# EAGLE board tes1-print (EAGLE 6.2)
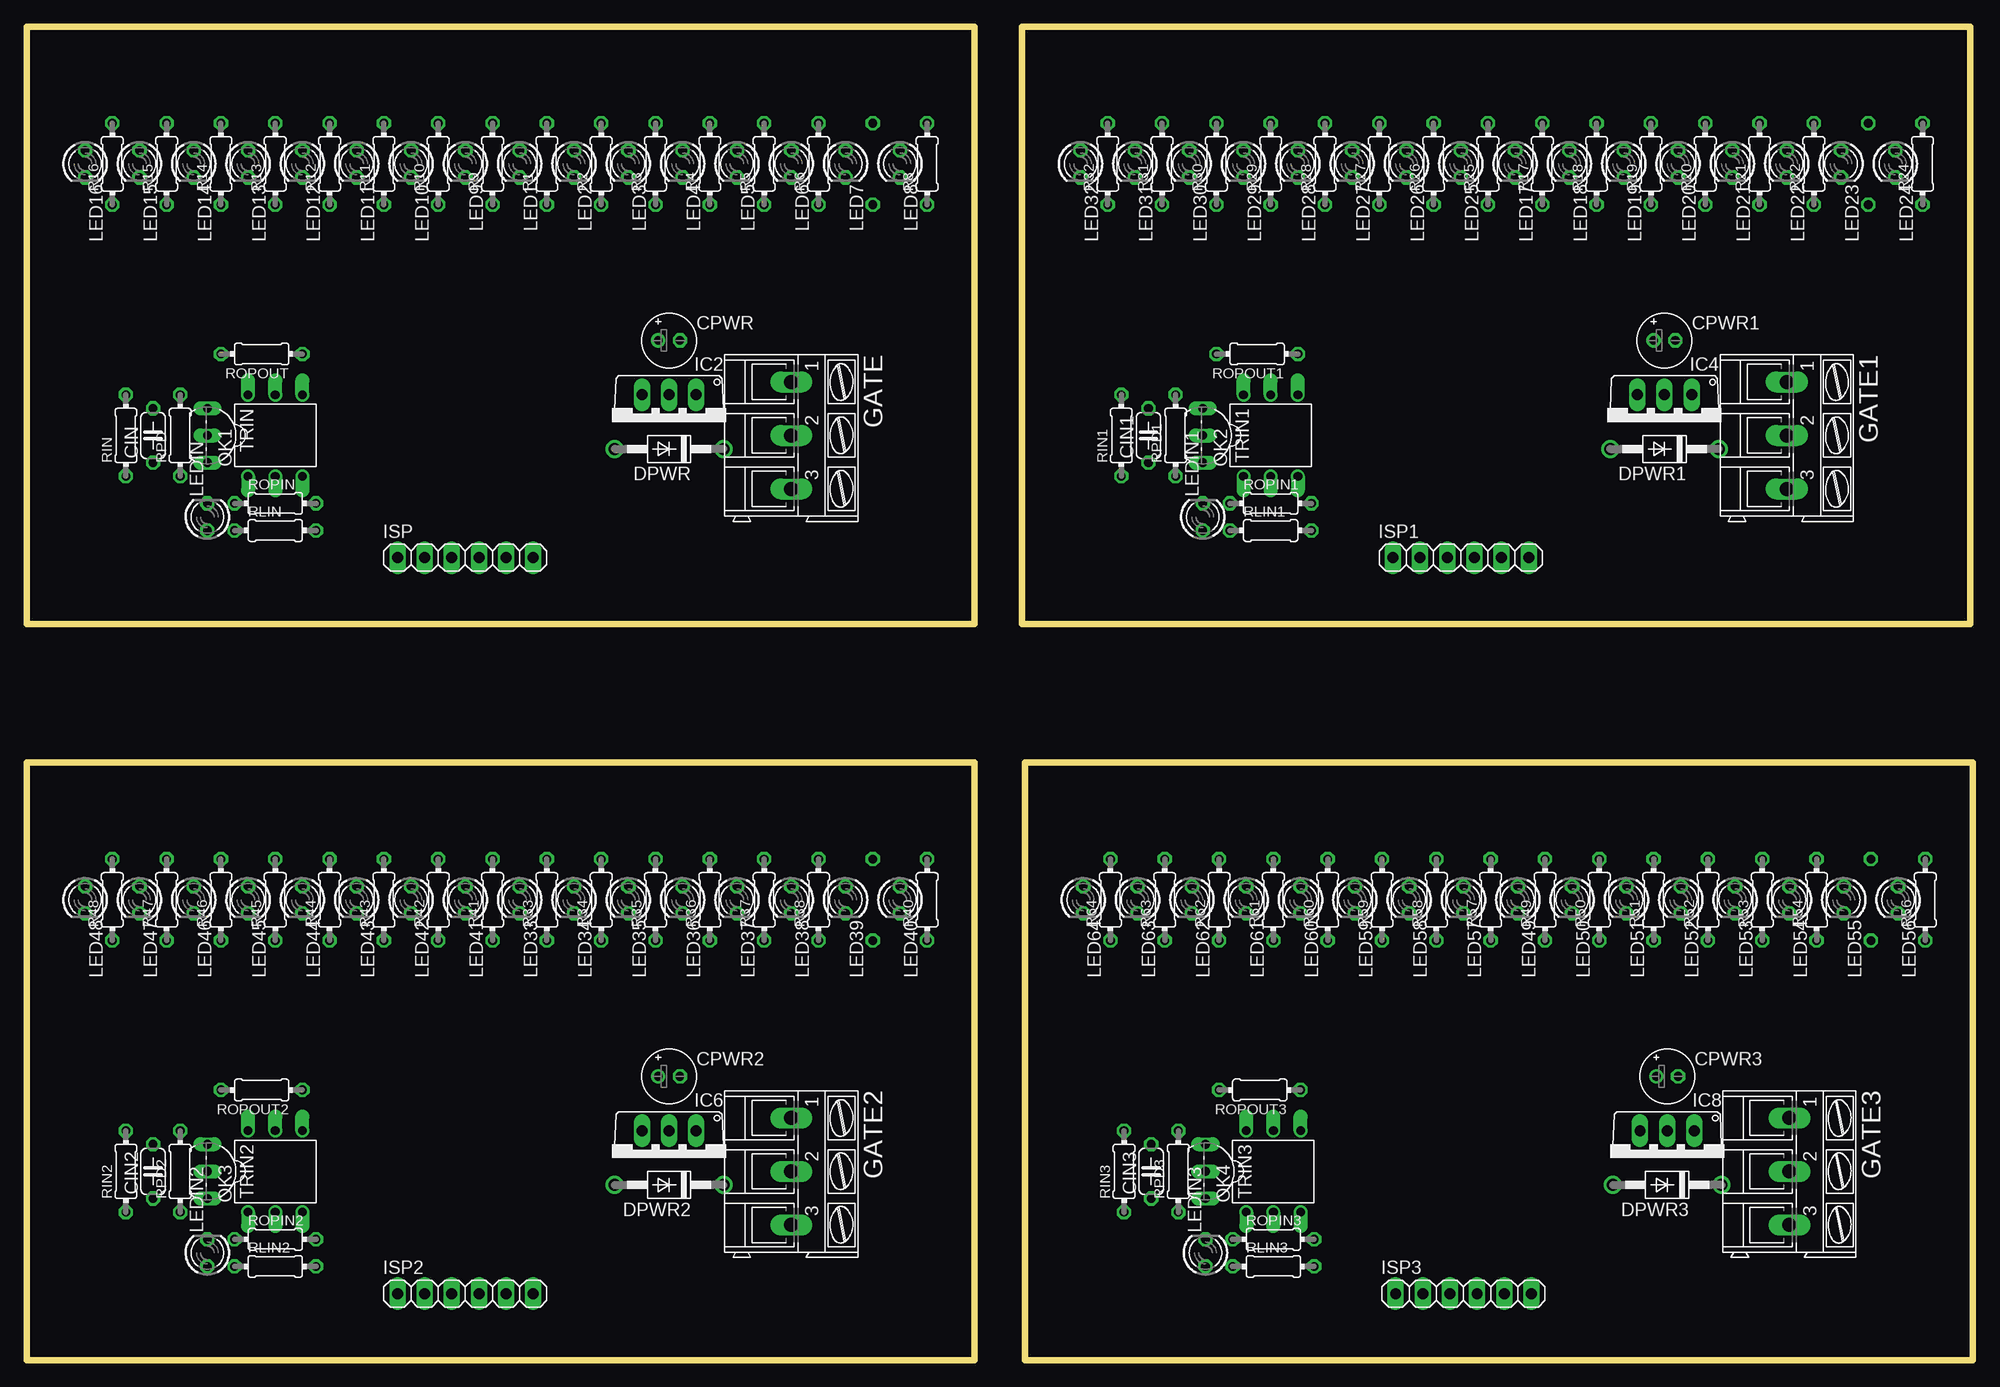
[diagram p0: board, top side]
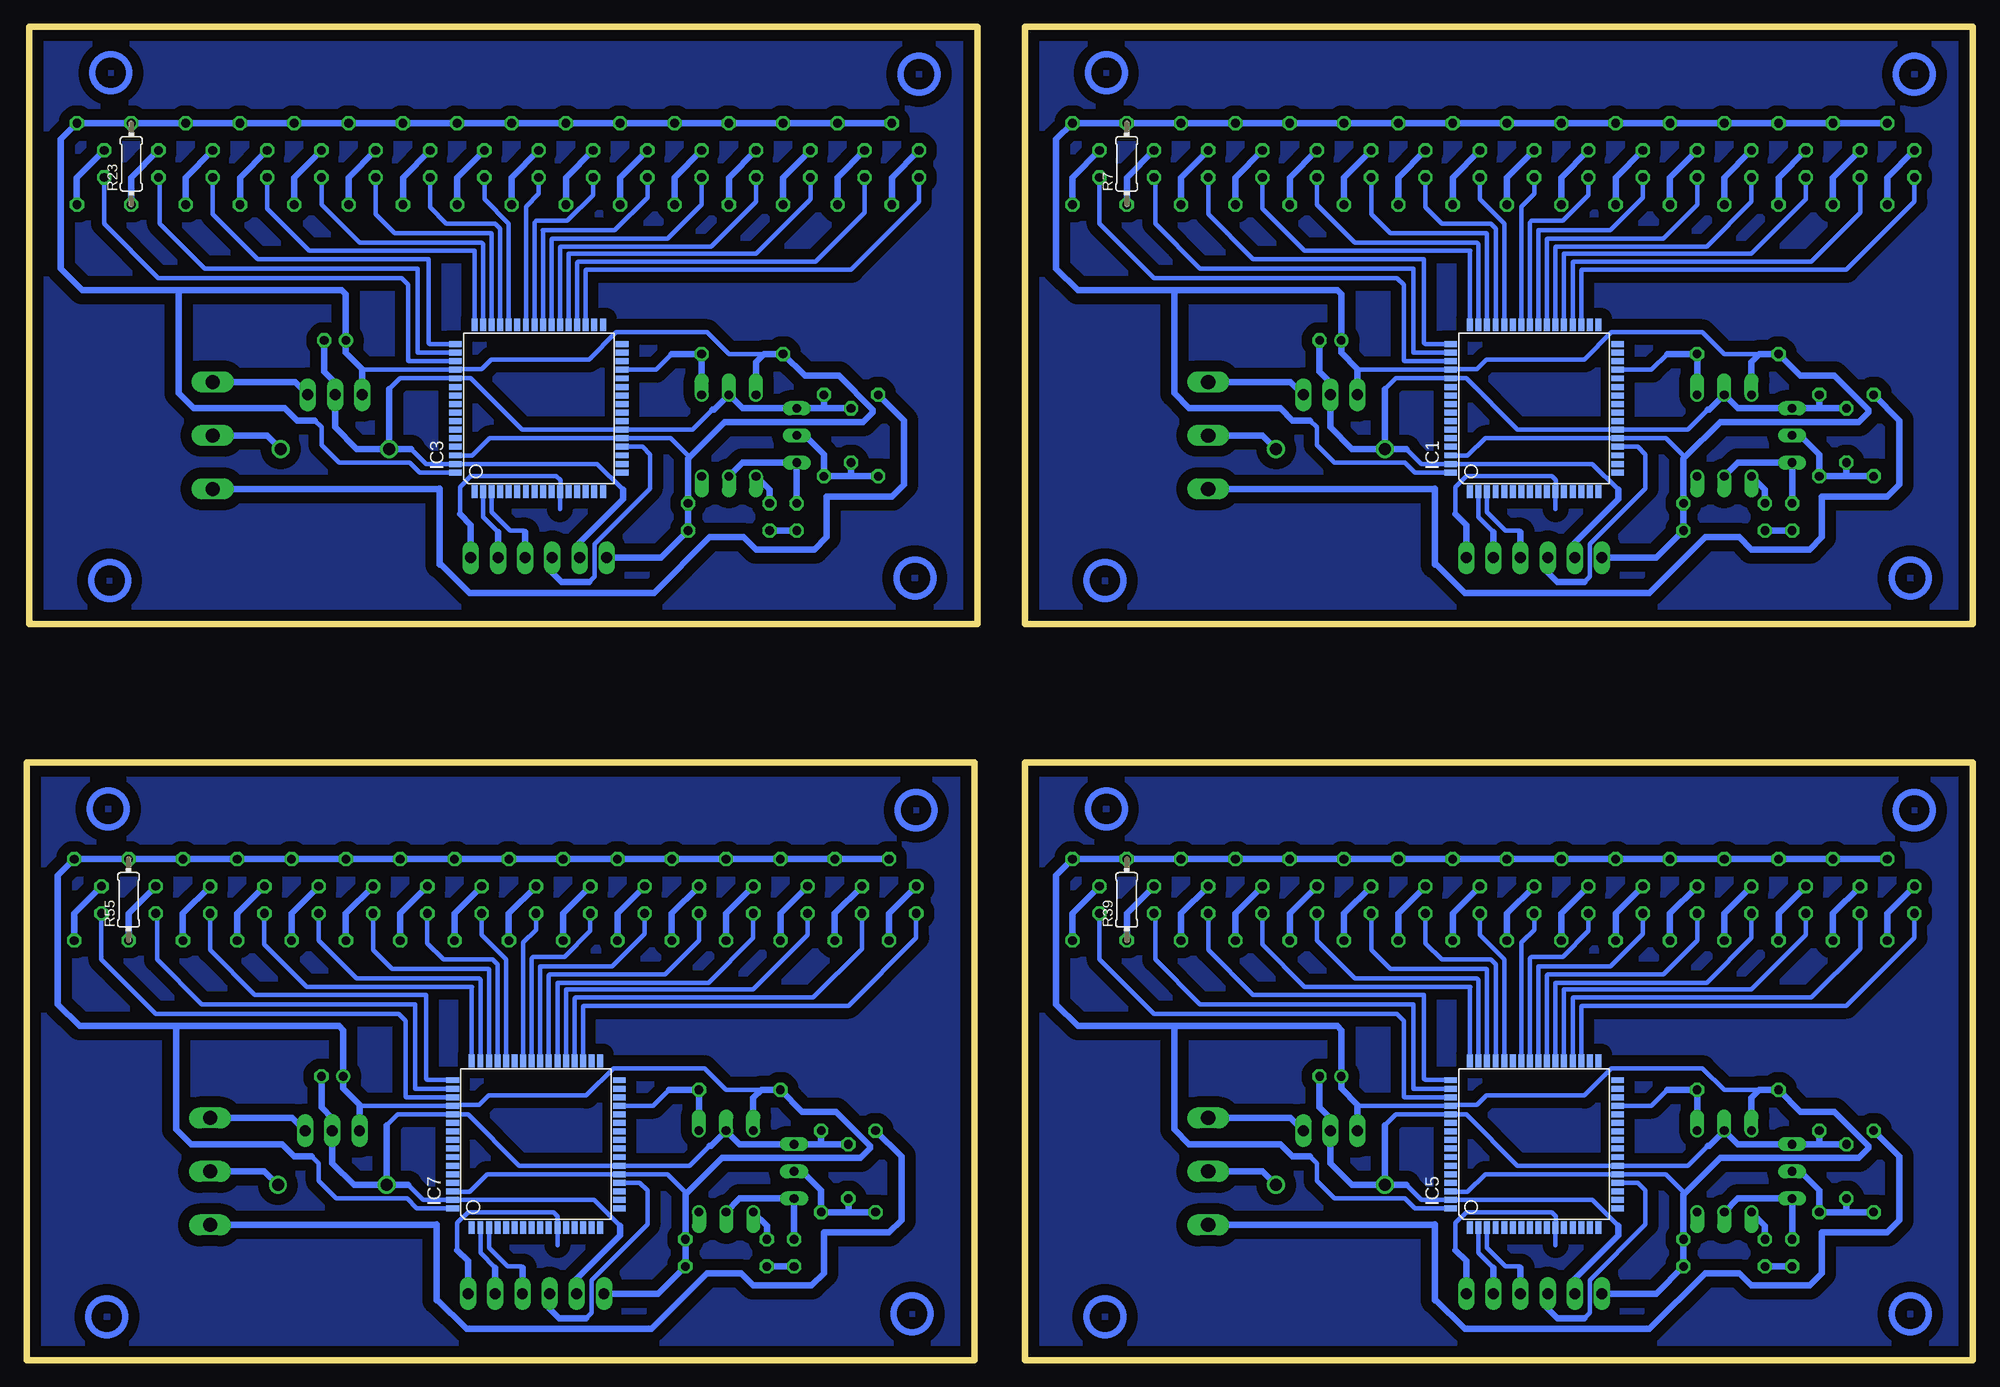
[diagram p1: board, bottom side, seen from below]

Size 181.99 x 124.71 mm. Coordinates in mm from the lower left corner, seen from the top.
Outline: 88.65,124.71 88.65,68.83 0,68.83 0,124.71 88.65,124.71
Outline: 181.74,124.71 181.74,68.83 93.09,68.83 93.09,124.71 181.74,124.71
Outline: 88.65,55.88 88.65,0 0,0 0,55.88 88.65,55.88
Outline: 181.99,55.88 181.99,0 93.34,0 93.34,55.88 181.99,55.88
Copper layers (1*16): Top 0.035mm / dielectric 1.5mm / Bottom 0.035mm
Design rules: minimum track width 10mil, minimum drill 24mil, track to track 8mil, track to pad 8mil, pad to pad 8mil, via to via 8mil, smd to smd 8mil, copper to edge 40mil, drill to drill 8mil, minimum pad ring 10mil, minimum via ring 8mil, stop-mask expansion 4mil, vias tented up to drill 0mil, thermal gap 10mil

## Footprints (pad centres in the part's own frame; a part is rotated, then mirrored left to right if it is on the bottom)
C050-024X044 = drill 0.813 octagon: 1 -2.54,0; 2 2.54,0
E2-5 = drill 0.813 pad 1.27: + -1.016,0 | drill 0.813 pad 1.27 octagon: - 1.016,0
DO41-10 = drill 1.118: A 5.08,0; C -5.08,0
AK300/3 = drill 1.321 long: 1 -5.004,0; 2 0,0; 3 5.004,0
TQFP64 = smd 1.194 x 0.559: 1 -7.8,6; 2 -7.8,5.2; 3 -7.8,4.4; 4 -7.8,3.6; 5 -7.8,2.8; 6 -7.8,2; 7 -7.8,1.2; 8 -7.8,0.4; 9 -7.8,-0.4; 10 -7.8,-1.2; 11 -7.8,-2; 12 -7.8,-2.8; 13 -7.8,-3.6; 14 -7.8,-4.4; 15 -7.8,-5.2; 16 -7.8,-6; 33 7.8,-6; 34 7.8,-5.2; 35 7.8,-4.4; 36 7.8,-3.6; 37 7.8,-2.8; 38 7.8,-2; 39 7.8,-1.2; 40 7.8,-0.4; 41 7.8,0.4; 42 7.8,1.2; 43 7.8,2; 44 7.8,2.8; 45 7.8,3.6; 46 7.8,4.4; 47 7.8,5.2; 48 7.8,6 | smd 0.559 x 1.194: 17 -6,-7.8; 18 -5.2,-7.8; 19 -4.4,-7.8; 20 -3.6,-7.8; 21 -2.8,-7.8; 22 -2,-7.8; 23 -1.2,-7.8; 24 -0.4,-7.8; 25 0.4,-7.8; 26 1.2,-7.8; 27 2,-7.8; 28 2.8,-7.8; 29 3.6,-7.8; 30 4.4,-7.8; 31 5.2,-7.8; 32 6,-7.8; 49 6,7.8; 50 5.2,7.8; 51 4.4,7.8; 52 3.6,7.8; 53 2.8,7.8; 54 2,7.8; 55 1.2,7.8; 56 0.4,7.8; 57 -0.4,7.8; 58 -1.2,7.8; 59 -2,7.8; 60 -2.8,7.8; 61 -3.6,7.8; 62 -4.4,7.8; 63 -5.2,7.8; 64 -6,7.8
TO220V = drill 1.016 long: 1 -2.54,-2.54; 2 0,-2.54; 3 2.54,-2.54
1X06 = drill 1.016 long: 1 -6.35,0; 2 -3.81,0; 3 -1.27,0; 4 1.27,0; 5 3.81,0; 6 6.35,0
LED3MM = drill 0.813 octagon: A -1.27,0; K 1.27,0
DIL06 = drill 0.813 offset: 1 -2.54,-3.81; 2 0,-3.81; 3 2.54,-3.81; 4 2.54,3.81; 5 0,3.81; 6 -2.54,3.81
0204/7 = drill 0.813 octagon: 1 -3.81,0; 2 3.81,0
TO92-EBC = drill 0.813 long: B 0,-1.27; C 2.54,-1.27; E -2.54,-1.27

## Placement (x,y rotation side)
CIN  100n  [C050-024X044]  11.81,86.49 90 top
CIN1  100n  [C050-024X044]  104.9,86.49 90 top
CIN2  100n  [C050-024X044]  11.81,17.65 90 top
CIN3  100n  [C050-024X044]  105.16,17.65 90 top
CPWR  100u  [E2-5]  60.07,95.38 0 top
CPWR1  100u  [E2-5]  153.16,95.38 0 top
CPWR2  100u  [E2-5]  60.07,26.54 0 top
CPWR3  100u  [E2-5]  153.42,26.54 0 top
DPWR  1N4004  [DO41-10]  60.07,85.22 180 top
DPWR1  1N4004  [DO41-10]  153.16,85.22 180 top
DPWR2  1N4004  [DO41-10]  60.07,16.38 180 top
DPWR3  1N4004  [DO41-10]  153.42,16.38 180 top
GATE  [AK300/3]  71.5,86.49 270 top
GATE1  [AK300/3]  164.59,86.49 270 top
GATE2  [AK300/3]  71.5,17.65 270 top
GATE3  [AK300/3]  164.85,17.65 270 top
IC1  MEGA128-A  [TQFP64]  41.02,89.03 90 bottom
IC2  7805TV  [TO220V]  60.07,87.76 180 top
IC3  MEGA128-A  [TQFP64]  134.11,89.03 90 bottom
IC4  7805TV  [TO220V]  153.16,87.76 180 top
IC5  MEGA128-A  [TQFP64]  41.02,20.19 90 bottom
IC6  7805TV  [TO220V]  60.07,18.92 180 top
IC7  MEGA128-A  [TQFP64]  134.37,20.19 90 bottom
IC8  7805TV  [TO220V]  153.42,18.92 180 top
ISP  [1X06]  41.02,75.06 0 top
ISP1  [1X06]  134.11,75.06 0 top
ISP2  [1X06]  41.02,6.22 0 top
ISP3  [1X06]  134.37,6.22 0 top
LED1  [LED3MM]  46.1,111.89 270 top
LED2  [LED3MM]  51.18,111.89 270 top
LED3  [LED3MM]  56.26,111.89 270 top
LED4  [LED3MM]  61.34,111.89 270 top
LED5  [LED3MM]  66.42,111.89 270 top
LED6  [LED3MM]  71.5,111.89 270 top
LED7  [LED3MM]  76.58,111.89 270 top
LED8  [LED3MM]  81.66,111.89 270 top
LED9  [LED3MM]  41.02,111.89 270 top
LED10  [LED3MM]  35.94,111.89 270 top
LED11  [LED3MM]  30.86,111.89 270 top
LED12  [LED3MM]  25.78,111.89 270 top
LED13  [LED3MM]  20.7,111.89 270 top
LED14  [LED3MM]  15.62,111.89 270 top
LED15  [LED3MM]  10.54,111.89 270 top
LED16  [LED3MM]  5.46,111.89 270 top
LED17  [LED3MM]  139.19,111.89 270 top
LED18  [LED3MM]  144.27,111.89 270 top
LED19  [LED3MM]  149.35,111.89 270 top
LED20  [LED3MM]  154.43,111.89 270 top
LED21  [LED3MM]  159.51,111.89 270 top
LED22  [LED3MM]  164.59,111.89 270 top
LED23  [LED3MM]  169.67,111.89 270 top
LED24  [LED3MM]  174.75,111.89 270 top
LED25  [LED3MM]  134.11,111.89 270 top
LED26  [LED3MM]  129.03,111.89 270 top
LED27  [LED3MM]  123.95,111.89 270 top
LED28  [LED3MM]  118.87,111.89 270 top
LED29  [LED3MM]  113.79,111.89 270 top
LED30  [LED3MM]  108.71,111.89 270 top
LED31  [LED3MM]  103.63,111.89 270 top
LED32  [LED3MM]  98.55,111.89 270 top
LED33  [LED3MM]  46.1,43.05 270 top
LED34  [LED3MM]  51.18,43.05 270 top
LED35  [LED3MM]  56.26,43.05 270 top
LED36  [LED3MM]  61.34,43.05 270 top
LED37  [LED3MM]  66.42,43.05 270 top
LED38  [LED3MM]  71.5,43.05 270 top
LED39  [LED3MM]  76.58,43.05 270 top
LED40  [LED3MM]  81.66,43.05 270 top
LED41  [LED3MM]  41.02,43.05 270 top
LED42  [LED3MM]  35.94,43.05 270 top
LED43  [LED3MM]  30.86,43.05 270 top
LED44  [LED3MM]  25.78,43.05 270 top
LED45  [LED3MM]  20.7,43.05 270 top
LED46  [LED3MM]  15.62,43.05 270 top
LED47  [LED3MM]  10.54,43.05 270 top
LED48  [LED3MM]  5.46,43.05 270 top
LED49  [LED3MM]  139.45,43.05 270 top
LED50  [LED3MM]  144.53,43.05 270 top
LED51  [LED3MM]  149.61,43.05 270 top
LED52  [LED3MM]  154.69,43.05 270 top
LED53  [LED3MM]  159.77,43.05 270 top
LED54  [LED3MM]  164.85,43.05 270 top
LED55  [LED3MM]  169.93,43.05 270 top
LED56  [LED3MM]  175.01,43.05 270 top
LED57  [LED3MM]  134.37,43.05 270 top
LED58  [LED3MM]  129.29,43.05 270 top
LED59  [LED3MM]  124.21,43.05 270 top
LED60  [LED3MM]  119.13,43.05 270 top
LED61  [LED3MM]  114.05,43.05 270 top
LED62  [LED3MM]  108.97,43.05 270 top
LED63  [LED3MM]  103.89,43.05 270 top
LED64  [LED3MM]  98.81,43.05 270 top
LEDIN  [LED3MM]  16.89,78.87 90 top
LEDIN1  [LED3MM]  109.98,78.87 90 top
LEDIN2  [LED3MM]  16.89,10.03 90 top
LEDIN3  [LED3MM]  110.24,10.03 90 top
OK1  H11L1M  [DIL06]  23.24,86.49 0 top
OK2  H11L1M  [DIL06]  116.33,86.49 0 top
OK3  H11L1M  [DIL06]  23.24,17.65 0 top
OK4  H11L1M  [DIL06]  116.59,17.65 0 top
R1  220  [0204/7]  48.64,111.89 90 top
R2  220  [0204/7]  53.72,111.89 90 top
R3  220  [0204/7]  58.8,111.89 90 top
R4  220  [0204/7]  63.88,111.89 90 top
R5  220  [0204/7]  68.96,111.89 90 top
R6  220  [0204/7]  74.04,111.89 90 top
R7  220  [0204/7]  79.12,111.89 90 bottom
R8  220  [0204/7]  84.2,111.89 90 top
R9  220  [0204/7]  43.56,111.89 90 top
R10  220  [0204/7]  38.48,111.89 90 top
R11  220  [0204/7]  33.4,111.89 90 top
R12  220  [0204/7]  28.32,111.89 90 top
R13  220  [0204/7]  23.24,111.89 90 top
R14  220  [0204/7]  18.16,111.89 90 top
R15  220  [0204/7]  13.08,111.89 90 top
R16  220  [0204/7]  8,111.89 90 top
R17  220  [0204/7]  141.73,111.89 90 top
R18  220  [0204/7]  146.81,111.89 90 top
R19  220  [0204/7]  151.89,111.89 90 top
R20  220  [0204/7]  156.97,111.89 90 top
R21  220  [0204/7]  162.05,111.89 90 top
R22  220  [0204/7]  167.13,111.89 90 top
R23  220  [0204/7]  172.21,111.89 90 bottom
R24  220  [0204/7]  177.29,111.89 90 top
R25  220  [0204/7]  136.65,111.89 90 top
R26  220  [0204/7]  131.57,111.89 90 top
R27  220  [0204/7]  126.49,111.89 90 top
R28  220  [0204/7]  121.41,111.89 90 top
R29  220  [0204/7]  116.33,111.89 90 top
R30  220  [0204/7]  111.25,111.89 90 top
R31  220  [0204/7]  106.17,111.89 90 top
R32  220  [0204/7]  101.09,111.89 90 top
R33  220  [0204/7]  48.64,43.05 90 top
R34  220  [0204/7]  53.72,43.05 90 top
R35  220  [0204/7]  58.8,43.05 90 top
R36  220  [0204/7]  63.88,43.05 90 top
R37  220  [0204/7]  68.96,43.05 90 top
R38  220  [0204/7]  74.04,43.05 90 top
R39  220  [0204/7]  79.12,43.05 90 bottom
R40  220  [0204/7]  84.2,43.05 90 top
R41  220  [0204/7]  43.56,43.05 90 top
R42  220  [0204/7]  38.48,43.05 90 top
R43  220  [0204/7]  33.4,43.05 90 top
R44  220  [0204/7]  28.32,43.05 90 top
R45  220  [0204/7]  23.24,43.05 90 top
R46  220  [0204/7]  18.16,43.05 90 top
R47  220  [0204/7]  13.08,43.05 90 top
R48  220  [0204/7]  8,43.05 90 top
R49  220  [0204/7]  141.99,43.05 90 top
R50  220  [0204/7]  147.07,43.05 90 top
R51  220  [0204/7]  152.15,43.05 90 top
R52  220  [0204/7]  157.23,43.05 90 top
R53  220  [0204/7]  162.31,43.05 90 top
R54  220  [0204/7]  167.39,43.05 90 top
R55  220  [0204/7]  172.47,43.05 90 bottom
R56  220  [0204/7]  177.55,43.05 90 top
R57  220  [0204/7]  136.91,43.05 90 top
R58  220  [0204/7]  131.83,43.05 90 top
R59  220  [0204/7]  126.75,43.05 90 top
R60  220  [0204/7]  121.67,43.05 90 top
R61  220  [0204/7]  116.59,43.05 90 top
R62  220  [0204/7]  111.51,43.05 90 top
R63  220  [0204/7]  106.43,43.05 90 top
R64  220  [0204/7]  101.35,43.05 90 top
RIN  1k  [0204/7]  9.27,86.49 90 top
RIN1  1k  [0204/7]  102.36,86.49 90 top
RIN2  1k  [0204/7]  9.27,17.65 90 top
RIN3  1k  [0204/7]  102.62,17.65 90 top
RLIN  220  [0204/7]  23.24,77.6 0 top
RLIN1  220  [0204/7]  116.33,77.6 0 top
RLIN2  220  [0204/7]  23.24,8.76 0 top
RLIN3  220  [0204/7]  116.59,8.76 0 top
ROPIN  220  [0204/7]  23.24,80.14 0 top
ROPIN1  220  [0204/7]  116.33,80.14 0 top
ROPIN2  220  [0204/7]  23.24,11.3 0 top
ROPIN3  220  [0204/7]  116.59,11.3 0 top
ROPOUT  4k7  [0204/7]  21.97,94.11 180 top
ROPOUT1  4k7  [0204/7]  115.06,94.11 180 top
ROPOUT2  4k7  [0204/7]  21.97,25.27 180 top
ROPOUT3  4k7  [0204/7]  115.32,25.27 180 top
RPD  4k7  [0204/7]  14.35,86.49 90 top
RPD1  4k7  [0204/7]  107.44,86.49 90 top
RPD2  4k7  [0204/7]  14.35,17.65 90 top
RPD3  4k7  [0204/7]  107.7,17.65 90 top
TRIN  [TO92-EBC]  18.16,86.49 270 top
TRIN1  [TO92-EBC]  111.25,86.49 270 top
TRIN2  [TO92-EBC]  18.16,17.65 270 top
TRIN3  [TO92-EBC]  111.51,17.65 270 top

## Library data of the parts
CIN CIN1-CIN3 CPWR CPWR1-CPWR3 R1-R64 RIN RIN1-RIN3 RLIN RLIN1-RLIN3 ROPIN ROPIN1-ROPIN3 ROPOUT ROPOUT1-ROPOUT3 RPD RPD1-RPD3 = resistor
DPWR DPWR1-DPWR3 = diode
GATE GATE1-GATE3 = con-ptr500; OC_FARNELL: unknown; OC_NEWARK: unknown
IC1 IC3 IC5 IC7 = atmel; MPN: ATMEGA128-16AU; OC_FARNELL: 9171118; OC_NEWARK: 95K7364
IC2 IC4 IC6 IC8 = linear
ISP ISP1-ISP3 = pinhead
LED1-LED64 LEDIN LEDIN1-LEDIN3 = led
OK1-OK4 = optocoupler; MF: FAIRCHILD SEMICONDUCTOR; MPN: H11L1-M; OC_FARNELL: 1021127; OC_NEWARK: 72K8643
TRIN TRIN1-TRIN3 = transistor

## Nets
FIN: IC1.29 OK1.4 ROPOUT.1
FIN1: IC3.29 OK2.4 ROPOUT1.1
FIN2: IC5.29 OK3.4 ROPOUT2.1
FIN3: IC7.29 OK4.4 ROPOUT3.1
GND: CIN.2 CPWR.- DPWR.A IC1.22 IC1.53 IC1.63 IC2.2 ISP.2 OK1.5 RPD.2 TRIN.E
GND1: CIN1.2 CPWR1.- DPWR1.A IC3.22 IC3.53 IC3.63 IC4.2 ISP1.2 OK2.5 RPD1.2 TRIN1.E
GND2: CIN2.2 CPWR2.- DPWR2.A IC5.22 IC5.53 IC5.63 IC6.2 ISP2.2 OK3.5 RPD2.2 TRIN2.E
GND3: CIN3.2 CPWR3.- DPWR3.A IC7.22 IC7.53 IC7.63 IC8.2 ISP3.2 OK4.5 RPD3.2 TRIN3.E
IN: GATE.3 RIN.2
IN1: GATE1.3 RIN1.2
IN2: GATE2.3 RIN2.2
IN3: GATE3.3 RIN3.2
MISO: IC1.3 ISP.4
MISO1: IC3.3 ISP1.4
MISO2: IC5.3 ISP2.4
MISO3: IC7.3 ISP3.4
MOSI: IC1.2 ISP.5
MOSI1: IC3.2 ISP1.5
MOSI2: IC5.2 ISP2.5
MOSI3: IC7.2 ISP3.5
N$1: LED2.A R2.1
N$3: LED17.A R17.1
N$4: LED18.A R18.1
N$5: LED19.A R19.1
N$6: LED20.A R20.1
N$7: LED21.A R21.1
N$8: LED3.A R3.1
N$9: LED1.A R1.1
N$10: LED4.A R4.1
N$11: LED22.A R22.1
N$12: LED5.A R5.1
N$13: LED6.A R6.1
N$14: LED7.A R7.1
N$15: LED8.A R8.1
N$16: LED9.A R9.1
N$17: LED10.A R10.1
N$18: LED11.A R11.1
N$19: LED12.A R12.1
N$20: LED13.A R13.1
N$21: LED14.A R14.1
N$22: LED15.A R15.1
N$23: LED16.A R16.1
N$24: LED23.A R23.1
N$25: LED24.A R24.1
N$26: LED25.A R25.1
N$27: LED26.A R26.1
N$28: LED27.A R27.1
N$29: LED28.A R28.1
N$30: LED29.A R29.1
N$31: LED30.A R30.1
N$32: LED31.A R31.1
N$33: LED32.A R32.1
N$34: DPWR1.C GATE1.2
N$35: GATE1.1 IC4.1
N$36: CIN1.1 RIN1.1 RPD1.1 TRIN1.B
N$37: LEDIN1.K OK2.2 TRIN1.C
N$38: OK2.1 ROPIN1.1
N$39: LEDIN1.A RLIN1.1
N$41: LED33.A R33.1
N$42: LED34.A R34.1
N$43: LED35.A R35.1
N$44: LED36.A R36.1
N$45: DPWR.C GATE.2
N$46: GATE.1 IC2.1
N$47: LED37.A R37.1
N$48: LED38.A R38.1
N$49: CIN.1 RIN.1 RPD.1 TRIN.B
N$50: LEDIN.K OK1.2 TRIN.C
N$51: OK1.1 ROPIN.1
N$52: LEDIN.A RLIN.1
N$53: LED39.A R39.1
N$54: LED40.A R40.1
N$55: LED41.A R41.1
N$56: LED42.A R42.1
N$57: LED43.A R43.1
N$58: LED44.A R44.1
N$59: LED45.A R45.1
N$60: LED46.A R46.1
N$61: LED47.A R47.1
N$62: LED48.A R48.1
N$63: DPWR2.C GATE2.2
N$64: GATE2.1 IC6.1
N$65: CIN2.1 RIN2.1 RPD2.1 TRIN2.B
N$66: LEDIN2.K OK3.2 TRIN2.C
N$67: OK3.1 ROPIN2.1
N$68: LEDIN2.A RLIN2.1
N$70: LED49.A R49.1
N$71: LED50.A R50.1
N$72: LED51.A R51.1
N$73: LED52.A R52.1
N$74: LED53.A R53.1
N$75: LED54.A R54.1
N$76: LED55.A R55.1
N$77: LED56.A R56.1
N$78: LED57.A R57.1
N$79: LED58.A R58.1
N$80: LED59.A R59.1
N$81: LED60.A R60.1
N$82: LED61.A R61.1
N$83: LED62.A R62.1
N$84: LED63.A R63.1
N$85: LED64.A R64.1
N$86: DPWR3.C GATE3.2
N$87: GATE3.1 IC8.1
N$88: CIN3.1 RIN3.1 RPD3.1 TRIN3.B
N$89: LEDIN3.K OK4.2 TRIN3.C
N$90: OK4.1 ROPIN3.1
N$91: LEDIN3.A RLIN3.1
P1: IC1.44 LED1.K
P2: IC1.45 LED2.K
P3: IC1.46 LED3.K
P4: IC1.47 LED4.K
P5: IC1.48 LED5.K
P6: IC1.49 LED6.K
P7: IC1.50 LED7.K
P8: IC1.51 LED8.K
P9: IC1.42 LED9.K
P10: IC1.41 LED10.K
P11: IC1.40 LED11.K
P12: IC1.39 LED12.K
P13: IC1.38 LED13.K
P14: IC1.37 LED14.K
P15: IC1.36 LED15.K
P16: IC1.35 LED16.K
P17: IC3.44 LED17.K
P18: IC3.45 LED18.K
P19: IC3.46 LED19.K
P20: IC3.47 LED20.K
P21: IC3.48 LED21.K
P22: IC3.49 LED22.K
P23: IC3.50 LED23.K
P24: IC3.51 LED24.K
P25: IC3.35 LED32.K
P26: IC3.36 LED31.K
P27: IC3.37 LED30.K
P28: IC3.38 LED29.K
P29: IC3.39 LED28.K
P30: IC3.40 LED27.K
P31: IC3.41 LED26.K
P32: IC3.42 LED25.K
P33: IC5.44 LED33.K
P34: IC5.45 LED34.K
P35: IC5.46 LED35.K
P36: IC5.47 LED36.K
P37: IC5.48 LED37.K
P38: IC5.49 LED38.K
P39: IC5.50 LED39.K
P40: IC5.51 LED40.K
P41: IC5.35 LED48.K
P42: IC5.36 LED47.K
P43: IC5.37 LED46.K
P44: IC5.38 LED45.K
P45: IC5.39 LED44.K
P46: IC5.40 LED43.K
P47: IC5.41 LED42.K
P48: IC5.42 LED41.K
P49: IC7.44 LED49.K
P50: IC7.45 LED50.K
P51: IC7.46 LED51.K
P52: IC7.47 LED52.K
P53: IC7.48 LED53.K
P54: IC7.49 LED54.K
P55: IC7.50 LED55.K
P56: IC7.51 LED56.K
P57: IC7.35 LED64.K
P58: IC7.36 LED63.K
P59: IC7.37 LED62.K
P60: IC7.38 LED61.K
P61: IC7.39 LED60.K
P62: IC7.40 LED59.K
P63: IC7.41 LED58.K
P64: IC7.42 LED57.K
RST: IC1.20 ISP.3
RST1: IC3.20 ISP1.3
RST2: IC5.20 ISP2.3
RST3: IC7.20 ISP3.3
SCK: IC1.11 ISP.6
SCK1: IC3.11 ISP1.6
SCK2: IC5.11 ISP2.6
SCK3: IC7.11 ISP3.6
VCC: CPWR.+ IC1.21 IC1.52 IC1.62 IC1.64 IC2.3 ISP.1 OK1.6 R1.2 R2.2 R3.2 R4.2 R5.2 R6.2 R7.2 R8.2 R9.2 R10.2 R11.2 R12.2 R13.2 R14.2 R15.2 R16.2 RLIN.2 ROPIN.2 ROPOUT.2
VCC1: CPWR1.+ IC3.21 IC3.52 IC3.62 IC3.64 IC4.3 ISP1.1 OK2.6 R17.2 R18.2 R19.2 R20.2 R21.2 R22.2 R23.2 R24.2 R25.2 R26.2 R27.2 R28.2 R29.2 R30.2 R31.2 R32.2 RLIN1.2 ROPIN1.2 ROPOUT1.2
VCC2: CPWR2.+ IC5.21 IC5.52 IC5.62 IC5.64 IC6.3 ISP2.1 OK3.6 R33.2 R34.2 R35.2 R36.2 R37.2 R38.2 R39.2 R40.2 R41.2 R42.2 R43.2 R44.2 R45.2 R46.2 R47.2 R48.2 RLIN2.2 ROPIN2.2 ROPOUT2.2
VCC3: CPWR3.+ IC7.21 IC7.52 IC7.62 IC7.64 IC8.3 ISP3.1 OK4.6 R49.2 R50.2 R51.2 R52.2 R53.2 R54.2 R55.2 R56.2 R57.2 R58.2 R59.2 R60.2 R61.2 R62.2 R63.2 R64.2 RLIN3.2 ROPIN3.2 ROPOUT3.2

## Tracks (layer width: path | path; a pad name or v marks a point on that pad's centre or on a via)
FIN
  Bottom 0.406: IC1.29 30.05,92.63 28.57,94.11
  Bottom 0.61: OK1.4 ROPOUT.1 28.57,94.11
FIN1
  Bottom 0.406: IC3.29 123.15,92.63 121.67,94.11
  Bottom 0.61: OK2.4 ROPOUT1.1 121.67,94.11
FIN2
  Bottom 0.406: IC5.29 30.05,23.79 28.57,25.27
  Bottom 0.61: OK3.4 ROPOUT2.1 28.57,25.27
FIN3
  Bottom 0.406: IC7.29 123.4,23.79 121.92,25.27
  Bottom 0.61: OK4.4 ROPOUT3.1 121.92,25.27
GND
  Bottom 0.406: 52.96,85.22 51.57,83.83 IC1.63 35.57,83.83 33.15,81.41 | 24.76,88.9 26.64,87.03 IC1.22 42.58,87.03 47.38,91.83 IC1.53 53.97,91.83 54.99,90.81
  Bottom 0.61: CPWR.- 61.09,92.46 60.07,91.44 IC2.2 60.07,87.25 58.04,85.22 DPWR.A | 14.35,89.03 TRIN.E 21.97,89.03 OK1.5 24.64,88.9 24.76,88.9 | 14.35,89.03 CIN.2 | RPD.2 14.35,89.03 | 52.96,85.22 DPWR.A | 54.99,90.81 DPWR.A | 33.15,81.41 33.15,80.52 37.21,76.45 ISP.2
GND1
  Bottom 0.406: 146.05,85.22 144.66,83.83 IC3.63 128.66,83.83 126.24,81.41 | 117.86,88.9 119.73,87.03 IC3.22 135.67,87.03 140.47,91.83 IC3.53 147.06,91.83 148.08,90.81
  Bottom 0.61: CPWR1.- 154.18,92.46 153.16,91.44 IC4.2 153.16,87.25 151.13,85.22 DPWR1.A | 107.44,89.03 TRIN1.E 115.06,89.03 OK2.5 117.73,88.9 117.86,88.9 | 107.44,89.03 CIN1.2 | RPD1.2 107.44,89.03 | 146.05,85.22 DPWR1.A | 148.08,90.81 DPWR1.A | 126.24,81.41 126.24,80.52 130.3,76.45 ISP1.2
GND2
  Bottom 0.406: 52.96,16.38 51.57,14.99 IC5.63 35.57,14.99 33.15,12.57 | 24.76,20.07 26.64,18.19 IC5.22 42.58,18.19 47.38,22.99 IC5.53 53.97,22.99 54.99,21.97
  Bottom 0.61: CPWR2.- 61.09,23.62 60.07,22.61 IC6.2 60.07,18.42 58.04,16.38 DPWR2.A | 14.35,20.19 TRIN2.E 21.97,20.19 OK3.5 24.64,20.07 24.76,20.07 | 14.35,20.19 CIN2.2 | RPD2.2 14.35,20.19 | 52.96,16.38 DPWR2.A | 54.99,21.97 DPWR2.A | 33.15,12.57 33.15,11.68 37.21,7.62 ISP2.2
GND3
  Bottom 0.406: 146.3,16.38 144.91,14.99 IC7.63 128.91,14.99 126.49,12.57 | 118.11,20.07 119.98,18.19 IC7.22 135.92,18.19 140.72,22.99 IC7.53 147.31,22.99 148.34,21.97
  Bottom 0.61: CPWR3.- 154.43,23.62 153.42,22.61 IC8.2 153.42,18.42 151.38,16.38 DPWR3.A | 107.7,20.19 TRIN3.E 115.32,20.19 OK4.5 117.98,20.07 118.11,20.07 | 107.7,20.19 CIN3.2 | RPD3.2 107.7,20.19 | 146.3,16.38 DPWR3.A | 148.34,21.97 DPWR3.A | 126.49,12.57 126.49,11.68 130.56,7.62 ISP3.2
IN
  Bottom 0.61: GATE.3 50.34,81.48 50.29,81.53 50.29,74.55 | 50.29,74.55 50.29,74.42 | RIN.2 6.86,87.88 6.86,81.92 8,80.77 14.1,80.77 14.1,76.96 15.24,75.82 20.7,75.82 21.84,76.96 25.02,76.96 30.23,71.75 47.5,71.75 50.29,74.55
IN1
  Bottom 0.61: GATE1.3 143.43,81.48 143.38,81.53 143.38,74.55 | 143.38,74.55 143.38,74.42 | RIN1.2 99.95,87.88 99.95,81.92 101.09,80.77 107.19,80.77 107.19,76.96 108.33,75.82 113.79,75.82 114.94,76.96 118.11,76.96 123.32,71.75 140.59,71.75 143.38,74.55
IN2
  Bottom 0.61: GATE2.3 50.34,12.65 50.29,12.7 50.29,5.72 | 50.29,5.72 50.29,5.59 | RIN2.2 6.86,19.05 6.86,13.08 8,11.94 14.1,11.94 14.1,8.13 15.24,6.98 20.7,6.98 21.84,8.13 25.02,8.13 30.23,2.92 47.5,2.92 50.29,5.72
IN3
  Bottom 0.61: GATE3.3 143.69,12.65 143.64,12.7 143.64,5.72 | 143.64,5.72 143.64,5.59 | RIN3.2 100.2,19.05 100.2,13.08 101.35,11.94 107.44,11.94 107.44,8.13 108.59,6.98 114.05,6.98 115.19,8.13 118.36,8.13 123.57,2.92 140.84,2.92 143.64,5.72
MISO
  Bottom 0.406: IC1.3 45.42,79.33 43.69,77.6 42.42,77.6 42.29,77.47
  Bottom 0.61: 42.29,77.47 ISP.4
MISO1
  Bottom 0.406: IC3.3 138.51,79.33 136.78,77.6 135.51,77.6 135.38,77.47
  Bottom 0.61: 135.38,77.47 ISP1.4
MISO2
  Bottom 0.406: IC5.3 45.42,10.5 43.69,8.76 42.42,8.76 42.29,8.64
  Bottom 0.61: 42.29,8.64 ISP2.4
MISO3
  Bottom 0.406: IC7.3 138.77,10.5 137.03,8.76 135.76,8.76 135.64,8.64
  Bottom 0.61: 135.64,8.64 ISP3.4
MOSI
  Bottom 0.406: IC1.2 46.22,78.86 44.83,77.47
  Bottom 0.61: 44.83,77.47 ISP.5
MOSI1
  Bottom 0.406: IC3.2 139.31,78.86 137.92,77.47
  Bottom 0.61: 137.92,77.47 ISP1.5
MOSI2
  Bottom 0.406: IC5.2 46.22,10.03 44.83,8.64
  Bottom 0.61: 44.83,8.64 ISP2.5
MOSI3
  Bottom 0.406: IC7.2 139.57,10.03 138.18,8.64
  Bottom 0.61: 138.18,8.64 ISP3.5
N$1
  Bottom 0.61: LED2.A 53.72,110.62 R2.1
N$2
  pour Bottom (isolate 1.016): 0,124.71 88.65,124.71 88.65,68.83 0,68.83
N$3
  Bottom 0.61: LED17.A 141.73,110.62 R17.1
N$4
  Bottom 0.61: LED18.A 146.81,110.62 R18.1
N$5
  Bottom 0.61: LED19.A 151.89,110.62 R19.1
N$6
  Bottom 0.61: LED20.A 156.97,110.62 R20.1
N$7
  Bottom 0.61: LED21.A 162.05,110.62 R21.1
N$8
  Bottom 0.61: LED3.A 58.8,110.62 R3.1
N$9
  Bottom 0.61: LED1.A 48.64,110.62 R1.1
N$10
  Bottom 0.61: LED4.A 63.88,110.62 R4.1
N$11
  Bottom 0.61: LED22.A 167.13,110.62 R22.1
N$12
  Bottom 0.61: LED5.A 68.96,110.62 R5.1
N$13
  Bottom 0.61: LED6.A 74.04,110.62 R6.1
N$14
  Bottom 0.61: LED7.A 79.12,110.62 R7.1
N$15
  Bottom 0.61: LED8.A 84.2,110.62 R8.1
N$16
  Bottom 0.61: LED9.A 43.56,110.62 R9.1
N$17
  Bottom 0.61: LED10.A 38.48,110.62 R10.1
N$18
  Bottom 0.61: LED11.A 33.4,110.62 R11.1
N$19
  Bottom 0.61: LED12.A 28.32,110.62 R12.1
N$20
  Bottom 0.61: LED13.A 23.24,110.62 R13.1
N$21
  Bottom 0.61: LED14.A 18.16,110.62 R14.1
N$22
  Bottom 0.61: LED15.A 13.08,110.62 R15.1
N$23
  Bottom 0.61: LED16.A 8,110.62 R16.1
N$24
  Bottom 0.61: LED23.A 172.21,110.62 R23.1
N$25
  Bottom 0.61: LED24.A 177.29,110.62 R24.1
N$26
  Bottom 0.61: LED25.A 136.65,110.62 R25.1
N$27
  Bottom 0.61: LED26.A 131.57,110.62 R26.1
N$28
  Bottom 0.61: LED27.A 126.49,110.62 R27.1
N$29
  Bottom 0.61: LED28.A 121.41,110.62 R28.1
N$30
  Bottom 0.61: LED29.A 116.33,110.62 R29.1
N$31
  Bottom 0.61: LED30.A 111.25,110.62 R30.1
N$32
  Bottom 0.61: LED31.A 106.17,110.62 R31.1
N$33
  Bottom 0.61: LED32.A 101.09,110.62 R32.1
N$34
  Bottom 0.61: GATE1.2 159.51,86.49 DPWR1.C
N$35
  Bottom 0.61: GATE1.1 156.9,91.49 IC4.1
N$36
  Bottom 0.61: TRIN1.B 109.22,86.49 107.44,84.71 RPD1.1 105.03,82.68 | 105.03,82.68 RIN1.1 | CIN1.1 104.9,82.8 105.03,82.68
N$37
  Bottom 0.61: LEDIN1.K TRIN1.C 115.06,83.95 OK2.2
N$38
  Bottom 0.61: ROPIN1.1 112.52,81.41 OK2.1
N$39
  Bottom 0.61: LEDIN1.A RLIN1.1
N$40
  pour Bottom (isolate 1.016): 93.09,124.71 181.74,124.71 181.74,68.83 93.09,68.83
N$41
  Bottom 0.61: LED33.A 48.64,41.78 R33.1
N$42
  Bottom 0.61: LED34.A 53.72,41.78 R34.1
N$43
  Bottom 0.61: LED35.A 58.8,41.78 R35.1
N$44
  Bottom 0.61: LED36.A 63.88,41.78 R36.1
N$45
  Bottom 0.61: GATE.2 66.42,86.49 DPWR.C
N$46
  Bottom 0.61: GATE.1 63.81,91.49 IC2.1
N$47
  Bottom 0.61: LED37.A 68.96,41.78 R37.1
N$48
  Bottom 0.61: LED38.A 74.04,41.78 R38.1
N$49
  Bottom 0.61: TRIN.B 16.13,86.49 14.35,84.71 RPD.1 11.94,82.68 | 11.94,82.68 RIN.1 | CIN.1 11.81,82.8 11.94,82.68
N$50
  Bottom 0.61: LEDIN.K TRIN.C 21.97,83.95 OK1.2
N$51
  Bottom 0.61: ROPIN.1 19.43,81.41 OK1.1
N$52
  Bottom 0.61: LEDIN.A RLIN.1
N$53
  Bottom 0.61: LED39.A 79.12,41.78 R39.1
N$54
  Bottom 0.61: LED40.A 84.2,41.78 R40.1
N$55
  Bottom 0.61: LED41.A 43.56,41.78 R41.1
N$56
  Bottom 0.61: LED42.A 38.48,41.78 R42.1
N$57
  Bottom 0.61: LED43.A 33.4,41.78 R43.1
N$58
  Bottom 0.61: LED44.A 28.32,41.78 R44.1
N$59
  Bottom 0.61: LED45.A 23.24,41.78 R45.1
N$60
  Bottom 0.61: LED46.A 18.16,41.78 R46.1
N$61
  Bottom 0.61: LED47.A 13.08,41.78 R47.1
N$62
  Bottom 0.61: LED48.A 8,41.78 R48.1
N$63
  Bottom 0.61: GATE2.2 66.42,17.65 DPWR2.C
N$64
  Bottom 0.61: GATE2.1 63.81,22.66 IC6.1
N$65
  Bottom 0.61: TRIN2.B 16.13,17.65 14.35,15.88 RPD2.1 11.94,13.84 | 11.94,13.84 RIN2.1 | CIN2.1 11.81,13.97 11.94,13.84
N$66
  Bottom 0.61: LEDIN2.K TRIN2.C 21.97,15.11 OK3.2
N$67
  Bottom 0.61: ROPIN2.1 19.43,12.57 OK3.1
N$68
  Bottom 0.61: LEDIN2.A RLIN2.1
N$69
  pour Bottom (isolate 1.016): 0,55.88 88.65,55.88 88.65,0 0,0
N$70
  Bottom 0.61: LED49.A 141.99,41.78 R49.1
N$71
  Bottom 0.61: LED50.A 147.07,41.78 R50.1
N$72
  Bottom 0.61: LED51.A 152.15,41.78 R51.1
N$73
  Bottom 0.61: LED52.A 157.23,41.78 R52.1
N$74
  Bottom 0.61: LED53.A 162.31,41.78 R53.1
N$75
  Bottom 0.61: LED54.A 167.39,41.78 R54.1
N$76
  Bottom 0.61: LED55.A 172.47,41.78 R55.1
N$77
  Bottom 0.61: LED56.A 177.55,41.78 R56.1
N$78
  Bottom 0.61: LED57.A 136.91,41.78 R57.1
N$79
  Bottom 0.61: LED58.A 131.83,41.78 R58.1
N$80
  Bottom 0.61: LED59.A 126.75,41.78 R59.1
N$81
  Bottom 0.61: LED60.A 121.67,41.78 R60.1
N$82
  Bottom 0.61: LED61.A 116.59,41.78 R61.1
N$83
  Bottom 0.61: LED62.A 111.51,41.78 R62.1
N$84
  Bottom 0.61: LED63.A 106.43,41.78 R63.1
N$85
  Bottom 0.61: LED64.A 101.35,41.78 R64.1
N$86
  Bottom 0.61: GATE3.2 159.77,17.65 DPWR3.C
N$87
  Bottom 0.61: GATE3.1 157.15,22.66 IC8.1
N$88
  Bottom 0.61: TRIN3.B 109.47,17.65 107.7,15.88 RPD3.1 105.28,13.84 | 105.28,13.84 RIN3.1 | CIN3.1 105.16,13.97 105.28,13.84
N$89
  Bottom 0.61: LEDIN3.K TRIN3.C 115.32,15.11 OK4.2
N$90
  Bottom 0.61: ROPIN3.1 112.78,12.57 OK4.1
N$91
  Bottom 0.61: LEDIN3.A RLIN3.1
N$92
  pour Bottom (isolate 1.016): 93.34,55.88 181.99,55.88 181.99,0 93.34,0
P1
  Bottom 0.406: IC1.44 43.82,106.31 46.1,108.59 LED1.K
P2
  Bottom 0.406: IC1.45 44.62,105.84 45.09,106.3 49.66,106.3 51.18,107.82 LED2.K
P3
  Bottom 0.406: IC1.46 45.42,105.37 45.47,105.41 54.48,105.41 56.26,107.19 LED3.K
P4
  Bottom 0.406: IC1.47 46.22,104.39 46.36,104.52 57.78,104.52 61.34,108.08 LED4.K
P5
  Bottom 0.406: IC1.48 47.02,103.73 46.99,103.76 62.48,103.76 66.42,107.7 LED5.K
P6
  Bottom 0.406: IC1.49 51.21,95.03 51.31,95.12 51.31,103 67.31,103 71.5,107.19 LED6.K
P7
  Bottom 0.406: IC1.50 52.32,94.23 52.32,102.11 72.26,102.11 76.45,106.3 76.45,110.49 LED7.K
P8
  Bottom 0.406: IC1.51 53.17,93.43 53.21,93.47 53.21,100.58 53.85,101.22 76.58,101.22 81.66,106.3 LED8.K
P9
  Bottom 0.406: IC1.42 42.22,107.89 41.02,109.09 LED9.K
P10
  Bottom 0.406: IC1.41 41.42,106.41 41.28,106.55 38.35,106.55 35.94,108.97 LED10.K
P11
  Bottom 0.406: IC1.40 40.62,105.65 40.64,105.66 33.91,105.66 30.86,108.71 LED11.K
P12
  Bottom 0.406: IC1.39 39.82,104.83 39.75,104.9 28.96,104.9 25.78,108.08 LED12.K
P13
  Bottom 0.406: IC1.38 39.02,104.11 38.99,104.14 24.89,104.14 20.7,108.33 LED13.K
P14
  Bottom 0.406: IC1.37 38.22,103.5 38.23,103.5 20.7,103.5 15.62,108.59 LED14.K
P15
  Bottom 0.406: IC1.36 37.42,102.66 37.34,102.74 15.11,102.74 10.54,107.31 LED15.K
P16
  Bottom 0.406: IC1.35 36.62,101.94 36.58,101.98 11.81,101.98 5.46,108.33 LED16.K
P17
  Bottom 0.406: IC3.44 136.91,106.31 139.19,108.59 LED17.K
P18
  Bottom 0.406: IC3.45 137.71,105.84 138.18,106.3 142.75,106.3 144.27,107.82 LED18.K
P19
  Bottom 0.406: IC3.46 138.51,105.37 138.56,105.41 147.57,105.41 149.35,107.19 LED19.K
P20
  Bottom 0.406: IC3.47 139.31,104.39 139.45,104.52 150.88,104.52 154.43,108.08 LED20.K
P21
  Bottom 0.406: IC3.48 140.11,103.73 140.08,103.76 155.57,103.76 159.51,107.7 LED21.K
P22
  Bottom 0.406: IC3.49 144.3,95.03 144.4,95.12 144.4,103 160.4,103 164.59,107.19 LED22.K
P23
  Bottom 0.406: IC3.50 145.41,94.23 145.41,102.11 165.35,102.11 169.55,106.3 169.55,110.49 LED23.K
P24
  Bottom 0.406: IC3.51 146.26,93.43 146.3,93.47 146.3,100.58 146.94,101.22 169.67,101.22 174.75,106.3 LED24.K
P25
  Bottom 0.406: IC3.35 129.71,101.94 129.67,101.98 104.9,101.98 98.55,108.33 LED32.K
P26
  Bottom 0.406: IC3.36 130.51,102.66 130.43,102.74 108.2,102.74 103.63,107.31 LED31.K
P27
  Bottom 0.406: IC3.37 131.31,103.5 131.32,103.5 113.79,103.5 108.71,108.59 LED30.K
P28
  Bottom 0.406: IC3.38 132.11,104.11 132.08,104.14 117.98,104.14 113.79,108.33 LED29.K
P29
  Bottom 0.406: IC3.39 132.91,104.83 132.84,104.9 122.05,104.9 118.87,108.08 LED28.K
P30
  Bottom 0.406: IC3.40 133.71,105.65 133.73,105.66 127,105.66 123.95,108.71 LED27.K
P31
  Bottom 0.406: IC3.41 134.51,106.41 134.37,106.55 131.44,106.55 129.03,108.97 LED26.K
P32
  Bottom 0.406: IC3.42 135.31,107.89 134.11,109.09 LED25.K
P33
  Bottom 0.406: IC5.44 43.82,37.47 46.1,39.75 LED33.K
P34
  Bottom 0.406: IC5.45 44.62,37 45.09,37.47 49.66,37.47 51.18,38.99 LED34.K
P35
  Bottom 0.406: IC5.46 45.42,36.53 45.47,36.58 54.48,36.58 56.26,38.35 LED35.K
P36
  Bottom 0.406: IC5.47 46.22,35.55 46.36,35.69 57.78,35.69 61.34,39.24 LED36.K
P37
  Bottom 0.406: IC5.48 47.02,34.89 46.99,34.93 62.48,34.93 66.42,38.86 LED37.K
P38
  Bottom 0.406: IC5.49 51.21,26.19 51.31,26.29 51.31,34.16 67.31,34.16 71.5,38.35 LED38.K
P39
  Bottom 0.406: IC5.50 52.32,25.39 52.32,25.4 52.32,33.27 72.26,33.27 76.45,37.47 76.45,41.66 LED39.K
P40
  Bottom 0.406: IC5.51 53.17,24.59 53.21,24.64 53.21,31.75 53.85,32.39 76.58,32.39 81.66,37.47 LED40.K
P41
  Bottom 0.406: IC5.35 36.62,33.1 36.58,33.15 11.81,33.15 5.46,39.5 LED48.K
P42
  Bottom 0.406: IC5.36 37.42,33.83 37.34,33.91 15.11,33.91 10.54,38.48 LED47.K
P43
  Bottom 0.406: IC5.37 38.22,34.67 38.23,34.67 20.7,34.67 15.62,39.75 LED46.K
P44
  Bottom 0.406: IC5.38 39.02,35.27 38.99,35.31 24.89,35.31 20.7,39.5 LED45.K
P45
  Bottom 0.406: IC5.39 39.82,36 39.75,36.07 28.96,36.07 25.78,39.24 LED44.K
P46
  Bottom 0.406: IC5.40 40.62,36.81 40.64,36.83 33.91,36.83 30.86,39.88 LED43.K
P47
  Bottom 0.406: IC5.41 41.42,37.57 41.28,37.72 38.35,37.72 35.94,40.13 LED42.K
P48
  Bottom 0.406: IC5.42 42.22,39.06 41.02,40.26 LED41.K
P49
  Bottom 0.406: IC7.44 137.17,37.47 139.45,39.75 LED49.K
P50
  Bottom 0.406: IC7.45 137.97,37 138.43,37.47 143,37.47 144.53,38.99 LED50.K
P51
  Bottom 0.406: IC7.46 138.77,36.53 138.81,36.58 147.83,36.58 149.61,38.35 LED51.K
P52
  Bottom 0.406: IC7.47 139.57,35.55 139.7,35.69 151.13,35.69 154.69,39.24 LED52.K
P53
  Bottom 0.406: IC7.48 140.37,34.89 140.34,34.93 155.83,34.93 159.77,38.86 LED53.K
P54
  Bottom 0.406: IC7.49 144.56,26.19 144.65,26.29 144.65,34.16 160.66,34.16 164.85,38.35 LED54.K
P55
  Bottom 0.406: IC7.50 145.66,25.39 145.67,25.4 145.67,33.27 165.61,33.27 169.8,37.47 169.8,41.66 LED55.K
P56
  Bottom 0.406: IC7.51 146.51,24.59 146.56,24.64 146.56,31.75 147.19,32.39 169.93,32.39 175.01,37.47 LED56.K
P57
  Bottom 0.406: IC7.35 129.97,33.1 129.92,33.15 105.16,33.15 98.81,39.5 LED64.K
P58
  Bottom 0.406: IC7.36 130.77,33.83 130.68,33.91 108.46,33.91 103.89,38.48 LED63.K
P59
  Bottom 0.406: IC7.37 131.57,34.67 114.05,34.67 108.97,39.75 LED62.K
P60
  Bottom 0.406: IC7.38 132.37,35.27 132.33,35.31 118.24,35.31 114.05,39.5 LED61.K
P61
  Bottom 0.406: IC7.39 133.17,36 133.1,36.07 122.3,36.07 119.13,39.24 LED60.K
P62
  Bottom 0.406: IC7.40 133.97,36.81 133.99,36.83 127.25,36.83 124.21,39.88 LED59.K
P63
  Bottom 0.406: IC7.41 134.77,37.57 134.62,37.72 131.7,37.72 129.29,40.13 LED58.K
P64
  Bottom 0.406: IC7.42 135.57,39.06 134.37,40.26 LED57.K
RST
  Bottom 0.406: IC1.20 31.32,85.43 30.61,84.71 30.61,81.53 35.81,76.33 35.81,73.28 36.32,72.77
  Bottom 0.61: 36.32,72.77 38.86,72.77 39.75,73.66 ISP.3
RST1
  Bottom 0.406: IC3.20 124.42,85.43 123.7,84.71 123.7,81.53 128.91,76.33 128.91,73.28 129.41,72.77
  Bottom 0.61: 129.41,72.77 131.95,72.77 132.84,73.66 ISP1.3
RST2
  Bottom 0.406: IC5.20 31.32,16.59 30.61,15.88 30.61,12.7 35.81,7.49 35.81,4.45 36.32,3.94
  Bottom 0.61: 36.32,3.94 38.86,3.94 39.75,4.83 ISP2.3
RST3
  Bottom 0.406: IC7.20 124.67,16.59 123.95,15.88 123.95,12.7 129.16,7.49 129.16,4.45 129.67,3.94
  Bottom 0.61: 129.67,3.94 132.21,3.94 133.1,4.83 ISP3.3
SCK
  Bottom 0.406: 39.02,79.6 IC1.11 38.99,81.26 38.99,82.3 39.37,82.68 47.37,82.68 48.39,81.66 48.39,79.12
  Bottom 0.61: ISP.6 47.37,78.11 48.39,79.12
SCK1
  Bottom 0.406: 132.11,79.6 IC3.11 132.08,81.26 132.08,82.3 132.46,82.68 140.46,82.68 141.48,81.66 141.48,79.12
  Bottom 0.61: ISP1.6 140.46,78.11 141.48,79.12
SCK2
  Bottom 0.406: 39.02,10.76 IC5.11 38.99,12.43 38.99,13.46 39.37,13.84 47.37,13.84 48.39,12.83 48.39,10.29
  Bottom 0.61: ISP2.6 47.37,9.27 48.39,10.29
SCK3
  Bottom 0.406: 132.37,10.76 IC7.11 132.33,12.43 132.33,13.46 132.72,13.84 140.72,13.84 141.73,12.83 141.73,10.29
  Bottom 0.61: ISP3.6 140.72,9.27 141.73,10.29
VCC
  Bottom 0: 47.24,84.58 45.59,86.23 28.7,86.23 28.7,86.11 27.05,84.46 26.67,84.46 23.5,87.63 10.79,87.63 9.78,88.65 9.78,89.03 12.83,92.08 16.13,92.08
  Bottom 0.406: 57.53,92.58 57.49,92.63 IC1.52 48.74,92.71 46.36,92.71 45.47,93.6 36.32,93.6 33.78,96.14 25.27,96.14 23.24,94.11 ROPOUT.2 | 26.92,84.46 28.7,86.23 IC1.21 45.6,86.23 47.24,84.58 48.78,84.58 IC1.62 | IC1.64 52.17,83.03 53.09,83.95 59.69,83.95 61.34,85.6 61.34,87.25 61.98,87.88
  Bottom 0.61: R16.2 R15.2 R14.2 R13.2 R12.2 R11.2 R10.2 R9.2 R1.2 R2.2 R3.2 R4.2 R5.2 R6.2 R7.2 R8.2 85.73,114.17 85.73,102.11 83.69,100.08 74.68,100.08 | IC2.3 57.53,92.58 57.53,92.71 59.06,94.23 CPWR.+ 59.06,99.69 59.44,100.08 74.68,100.08 | ISP.1 29.59,75.06 RLIN.2 ROPIN.2 27.05,84.33 26.92,84.46 23.62,87.76 10.67,87.76 9.78,88.65 9.78,88.9 12.95,92.08 16.13,92.08 ROPOUT.2 19.94,94.11 20.7,93.34 OK1.6 | 61.98,87.88 63.63,87.88 64.77,89.03 73.28,89.03 74.68,90.42 74.68,100.08
VCC1
  Bottom 0: 140.34,84.58 138.68,86.23 121.79,86.23 121.79,86.11 120.14,84.46 119.76,84.46 116.59,87.63 103.89,87.63 102.87,88.65 102.87,89.03 105.92,92.08 109.22,92.08
  Bottom 0.406: 150.62,92.58 150.58,92.63 IC3.52 141.83,92.71 139.45,92.71 138.56,93.6 129.41,93.6 126.87,96.14 118.36,96.14 116.33,94.11 ROPOUT1.2 | 120.02,84.46 121.79,86.23 IC3.21 138.69,86.23 140.34,84.58 141.87,84.58 IC3.62 | IC3.64 145.26,83.03 146.18,83.95 152.78,83.95 154.43,85.6 154.43,87.25 155.07,87.88
  Bottom 0.61: R32.2 R31.2 R30.2 R29.2 R28.2 R27.2 R26.2 R25.2 R17.2 R18.2 R19.2 R20.2 R21.2 R22.2 R23.2 R24.2 178.82,114.17 178.82,102.11 176.78,100.08 167.77,100.08 | IC4.3 150.62,92.58 150.62,92.71 152.15,94.23 CPWR1.+ 152.15,99.69 152.53,100.08 167.77,100.08 | ISP1.1 122.68,75.06 RLIN1.2 ROPIN1.2 120.14,84.33 120.02,84.46 116.71,87.76 103.76,87.76 102.87,88.65 102.87,88.9 106.05,92.08 109.22,92.08 ROPOUT1.2 113.03,94.11 113.79,93.34 OK2.6 | 155.07,87.88 156.72,87.88 157.86,89.03 166.37,89.03 167.77,90.42 167.77,100.08
VCC2
  Bottom 0: 47.24,15.75 45.59,17.4 28.7,17.4 28.7,17.27 27.05,15.62 26.67,15.62 23.5,18.8 10.79,18.8 9.78,19.81 9.78,20.19 12.83,23.24 16.13,23.24
  Bottom 0.406: 57.53,23.75 57.49,23.79 IC5.52 48.74,23.88 46.36,23.88 45.47,24.77 36.32,24.77 33.78,27.31 25.27,27.31 23.24,25.27 ROPOUT2.2 | 26.92,15.62 28.7,17.39 IC5.21 45.6,17.39 47.24,15.75 48.78,15.75 IC5.62 | IC5.64 52.17,14.19 53.09,15.11 59.69,15.11 61.34,16.76 61.34,18.42 61.98,19.05
  Bottom 0.61: R48.2 R47.2 R46.2 R45.2 R44.2 R43.2 R42.2 R41.2 R33.2 R34.2 R35.2 R36.2 R37.2 R38.2 R39.2 R40.2 85.73,45.34 85.73,33.27 83.69,31.24 74.68,31.24 | IC6.3 57.53,23.75 57.53,23.88 59.06,25.4 CPWR2.+ 59.06,30.86 59.44,31.24 74.68,31.24 | ISP2.1 29.59,6.22 RLIN2.2 ROPIN2.2 27.05,15.49 26.92,15.62 23.62,18.92 10.67,18.92 9.78,19.81 9.78,20.07 12.95,23.24 16.13,23.24 ROPOUT2.2 19.94,25.27 20.7,24.51 OK3.6 | 61.98,19.05 63.63,19.05 64.77,20.19 73.28,20.19 74.68,21.59 74.68,31.24
VCC3
  Bottom 0: 140.59,15.75 138.94,17.4 122.05,17.4 122.05,17.27 120.4,15.62 120.02,15.62 116.84,18.8 104.14,18.8 103.12,19.81 103.12,20.19 106.17,23.24 109.47,23.24
  Bottom 0.406: 150.88,23.75 150.83,23.79 IC7.52 142.08,23.88 139.7,23.88 138.81,24.77 129.67,24.77 127.13,27.31 118.62,27.31 116.59,25.27 ROPOUT3.2 | 120.27,15.62 122.04,17.39 IC7.21 138.94,17.39 140.59,15.75 142.12,15.75 IC7.62 | IC7.64 145.51,14.19 146.43,15.11 153.03,15.11 154.69,16.76 154.69,18.42 155.32,19.05
  Bottom 0.61: R64.2 R63.2 R62.2 R61.2 R60.2 R59.2 R58.2 R57.2 R49.2 R50.2 R51.2 R52.2 R53.2 R54.2 R55.2 R56.2 179.07,45.34 179.07,33.27 177.04,31.24 168.02,31.24 | IC8.3 150.88,23.75 150.88,23.88 152.4,25.4 CPWR3.+ 152.4,30.86 152.78,31.24 168.02,31.24 | ISP3.1 122.94,6.22 RLIN3.2 ROPIN3.2 120.4,15.49 120.27,15.62 116.97,18.92 104.01,18.92 103.12,19.81 103.12,20.07 106.3,23.24 109.47,23.24 ROPOUT3.2 113.28,25.27 114.05,24.51 OK4.6 | 155.32,19.05 156.97,19.05 158.12,20.19 166.62,20.19 168.02,21.59 168.02,31.24
(copper drawn outside any net)
  shapes: Bottom circle x16